# Altium PCB PCB_Pixhawk_Linux_Carrier_2021-08-31.pcbdoc (part 2 of 2)
Units mm, origin at the board's own origin, x right, y up, seen from the top; angles counter-clockwise.
Board outline 111.76 x 82.8 mm, 2 copper layers (Top Layer, Bottom Layer); 53 components, 220 nets, 468 pads, 151 vias.
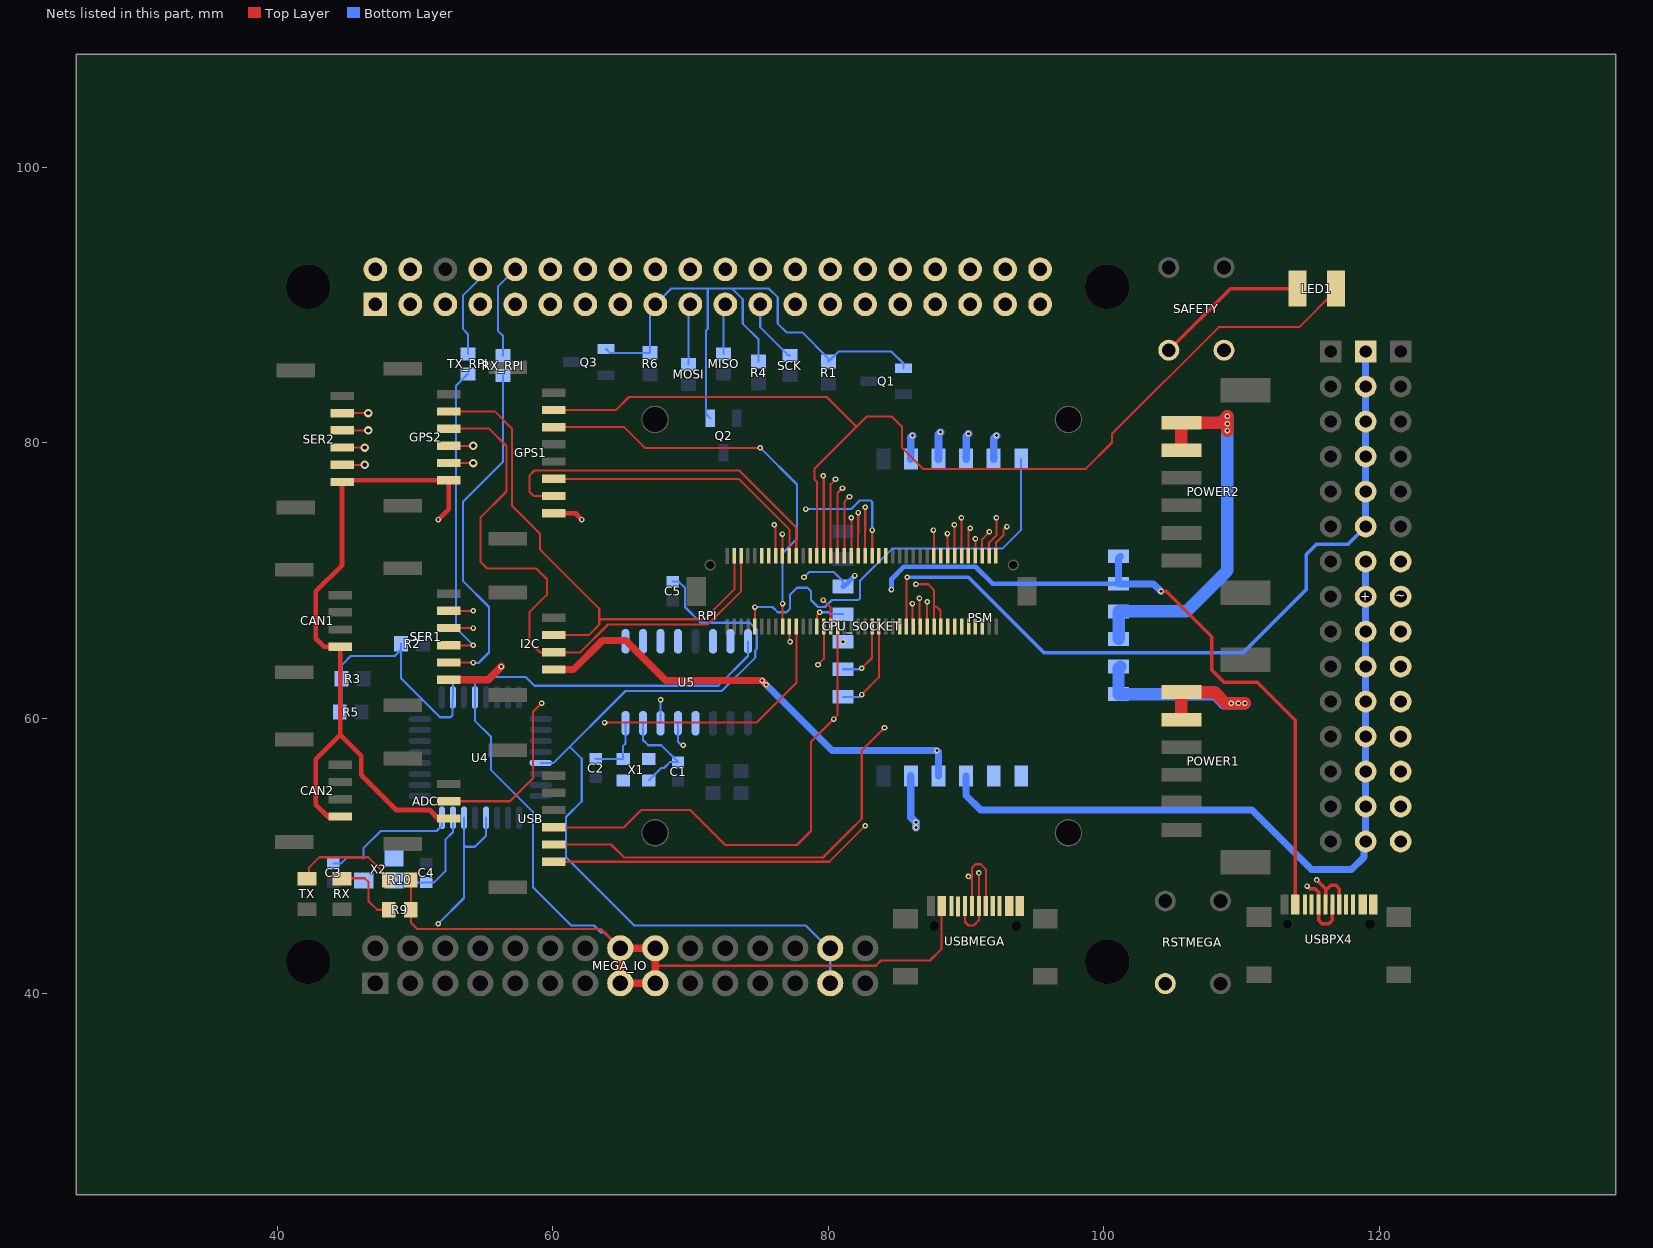
[diagram p2: the nets of this part, all layers, seen from the top]

## Via types
v1: diameter 0.4, hole 0.2, Top Layer to Bottom Layer, 145 vias
v2: diameter 0.61, hole 0.305, Top Layer to Bottom Layer, 6 vias

## Nets (pads, with @x,y where several pads share a name; then routed paths per layer and width w, separated by ;. In a path a pad name is that pad's centre, name@x,y a point inside that pad or via, vN(x,y) a via of type N, cw(c..) or ccw(c..) an arc to the next point about the centre after c; other vN are vias at no path point) (continued)
I2C_2_SCL: CPU_SOCKET.6 GPS2.4 I2C.2 | length 44.4
  Top Layer w0.15: GPS2.4@52.451,81.021 55.377,81.021 56.642,79.756 56.642,76.454 54.737,74.549 54.737,71.374 55.245,70.866 58.801,70.866 59.563,70.104 59.563,68.961 58.293,67.691 58.293,65.532 59.07,64.785 I2C.2@60.071,64.785 61.991,64.785 64.008,66.802 71.247,66.802 73.668,69.223 CPU_SOCKET.6@73.668,71.793
I2C_2_SDA: CPU_SOCKET.4 GPS2.5 I2C.3 | length 38.7
  Top Layer w0.15: GPS2.5@52.451,82.271 55.778,82.271 57.023,81.026 57.023,75.438 59.055,73.406 59.055,72.263 63.373,67.945 63.373,66.802 62.606,66.035 I2C.3@60.071,66.035 ; 63.373,67.183 70.993,67.183 73.172,69.362 CPU_SOCKET.4@73.172,71.79
IO-!RESET: CPU_SOCKET.75
IO-CH1-PROT: CPU_SOCKET.80 ~.7 | length 32.8
  Top Layer w0.15: CPU_SOCKET.80@92.165,71.793 92.165,72.734 92.71,73.279 92.71,73.66 v1(92.964,73.914)
  Mid-Layer 1 w0.254: v1(92.964,73.914) 92.71,73.66 92.71,73.152 93.218,72.644 120.015,72.644 121.412,71.374 ~.7@121.539,71.374
IO-CH2-PROT: CPU_SOCKET.78 ~.8 | length 37.7
  Top Layer w0.15: CPU_SOCKET.78@91.667,71.793 91.667,72.744 92.202,73.279 v1(92.202,74.549)
  Mid-Layer 1 w0.254: v1(92.202,74.549) 92.202,73.279 91.694,72.771 91.694,70.612 92.202,70.104 120.015,70.104 121.285,68.834 ~.8@121.539,68.834
IO-CH3-PROT: CPU_SOCKET.76 ~.9 | length 37.8
  Top Layer w0.15: CPU_SOCKET.76@91.164,71.793 91.164,73.003 v1(91.694,73.533)
  Mid-Layer 1 w0.254: v1(91.694,73.533) 91.186,73.025 91.186,69.723 93.345,67.564 120.269,67.564 ~.9@121.539,66.294
IO-CH4-PROT: CPU_SOCKET.74 ~.10 | length 37.9
  Top Layer w0.15: CPU_SOCKET.74@90.668,71.793 v1(90.678,73.025)
  Mid-Layer 1 w0.254: v1(90.678,73.025) 90.678,69.596 95.25,65.024 120.142,65.024 121.412,63.754 ~.10@121.539,63.754
IO-CH5-PROT: CPU_SOCKET.72 ~.11 | length 41.4
  Top Layer w0.15: CPU_SOCKET.72@90.166,71.793 90.166,73.656 v1(90.297,73.787)
  Mid-Layer 1 w0.254: v1(90.297,73.787) 90.071,73.561 90.071,69.441 97.028,62.484 120.015,62.484 121.285,61.214 ~.11@121.539,61.214
IO-CH6-PROT: CPU_SOCKET.70 ~.12 | length 44.4
  Top Layer w0.15: v1(89.662,74.549) CPU_SOCKET.70@89.665,71.791
  Mid-Layer 1 w0.254: v1(89.662,74.549) 89.662,69.088 92.456,66.294 92.583,66.294 98.933,59.944 120.142,59.944 121.412,58.674 ~.12@121.539,58.674
IO-CH7-PROT: CPU_SOCKET.68 ~.13 | length 45
  Top Layer w0.15: v1(89.154,74.041) CPU_SOCKET.68@89.165,71.792
  Mid-Layer 1 w0.254: v1(89.154,74.041) 89.154,68.961 100.711,57.404 120.142,57.404 121.412,56.134 ~.13@121.539,56.134
IO-CH8-PROT: CPU_SOCKET.66 ~.14 | length 45.4
  Top Layer w0.15: v1(88.646,73.406) CPU_SOCKET.66@88.667,71.793
  Mid-Layer 1 w0.254: v1(88.646,73.406) 88.646,68.834 102.616,54.864 120.015,54.864 121.285,53.594 ~.14@121.539,53.594
IO-LED_SAFET_PROT: CPU_SOCKET.28 GPS1.7 LED1.2 | length 77.5
  Top Layer w0.15: GPS1.7@60.071,82.378 64.598,82.378 65.532,83.312 79.883,83.312 82.042,81.153 82.804,81.915 84.582,81.915 85.344,81.153 85.344,79.629 86.868,78.105 98.679,78.105 100.584,80.01 100.584,80.645 108.331,88.392 114.173,88.392 116.843,91.062 LED1.2@116.843,91.186 ; CPU_SOCKET.28@79.165,71.79 79.165,77.172 78.994,77.343 78.994,78.105 82.1,81.211
IO-SWCLK: CPU_SOCKET.71
IO-SWDIO: CPU_SOCKET.69
IO-USART1_RX_SPEKTRUM_DSM: CPU_SOCKET.48
IO-USART1_TX: CPU_SOCKET.46
JP1_26: CPU_SOCKET.26
JP1_65: CPU_SOCKET.65
OTG_DM1: CPU_SOCKET.33 USB.3 USBPX4.A7 USBPX4.B7 | length 81.1
  Top Layer w0.15: USB.3@60.071,52.085 65.166,52.085 66.421,53.34 69.977,53.34 72.517,50.8 77.724,50.8 78.74,51.816 78.74,58.293 v1(80.391,59.944) 80.671,60.224 CPU_SOCKET.33@80.671,66.649
  Top Layer w0.254: v1(114.743,47.817) 114.935,47.625 115.316,47.625 115.582,47.359 USBPX4.B7@115.582,46.489 ; USBPX4.B7@115.582,46.489 115.583,45.326 115.824,45.085 116.332,45.085 116.581,45.344 USBPX4.A7@116.582,46.489
  Mid-Layer 2 w0.25: v1(80.391,59.944) 84.582,55.753 105.156,55.753 113.092,47.817 v1(114.743,47.817)
OTG_DM2: U5.6 USBMEGA.A7 USBMEGA.B7 | length 37.2
  Top Layer w0.15: USBMEGA.B7@89.928,46.362 89.916,45.212 90.17,44.958 90.551,44.958 90.927,45.334 USBMEGA.A7@90.928,46.362 v1(90.932,48.768)
  Mid-Layer 2 w0.15: v1(67.818,61.341) 67.818,59.182 68.453,58.547 69.596,58.547 77.089,51.054 88.773,51.054 90.932,48.895 v1(90.932,48.768)
  Bottom Layer w0.15: U5.6@67.818,59.639 v1(67.818,61.341)
OTG_DP1: CPU_SOCKET.31 USB.2 USBPX4.A6 USBPX4.B6 | length 88.3
  Top Layer w0.15: USB.2@60.071,50.835 64.227,50.835 65.173,49.889 79.607,49.889 81.534,51.816 82.423,52.705 82.423,57.658 v1(84.074,59.309) ; v1(79.629,68.58) 80.166,68.043 CPU_SOCKET.31@80.166,66.648
  Top Layer w0.254: v1(115.443,48.26) 116.083,47.62 116.083,47.503 ; USBPX4.A6@116.082,46.489 116.083,47.503 ; USBPX4.B6@117.082,46.489 117.081,47.612 116.84,47.879 116.459,47.879 116.083,47.503
  Mid-Layer 2 w0.25: v1(79.629,68.58) 80.137,68.072 80.137,61.087 82.169,59.055 82.169,58.928 ; v1(84.074,59.309) 83.693,58.928 82.169,58.928 ; v1(115.443,48.26) 115.189,48.514 112.966,48.514 112.966,48.578 105.156,56.388 84.709,56.388 82.169,58.928
OTG_DP2: U5.5 USBMEGA.A6 USBMEGA.B6 | length 33.8
  Top Layer w0.15: v1(90.17,48.514) 90.428,48.256 USBMEGA.A6@90.428,46.362 ; 90.429,48.255 90.429,49.144 90.678,49.403 91.059,49.403 91.427,49.035 USBMEGA.B6@91.428,46.362
  Mid-Layer 2 w0.15: v1(69.469,58.039) 76.835,50.673 88.392,50.673 90.17,48.895 v1(90.17,48.514)
  Bottom Layer w0.15: U5.5@69.088,59.639 69.088,58.293 69.342,58.039 v1(69.469,58.039)
PPM-SBUS-PROT: CPU_SOCKET.62 ~.15 | length 47.8
  Top Layer w0.15: v1(87.63,73.66) 87.667,73.623 CPU_SOCKET.62@87.667,71.793
  Mid-Layer 1 w0.254: v1(87.63,73.66) 87.63,69.215 104.521,52.324 119.761,52.324 121.031,51.054 ~.15@121.539,51.054
PRESSURE_SENS_IN: ADC.2 CPU_SOCKET.21 | length 37.3
  Top Layer w0.15: ADC.2@52.451,53.975 56.896,53.975 58.547,55.626 58.547,60.452 v1(59.182,61.087) ; v1(63.754,59.69) 74.803,59.69 77.672,62.559 CPU_SOCKET.21@77.672,66.649
  Mid-Layer 1 w0.15: v1(59.182,61.087) 59.182,60.325 59.817,59.69 v1(63.754,59.69)
PSM_2: PSM.2
R9_2: R9.2 RX.2 | length 5.2
  Top Layer w0.15: RX.2@44.704,48.344 44.747,48.387 46.355,48.387 46.609,48.133 46.609,46.736 47.244,46.101 R9.2@48.095,46.101
R10_2: R10.2 TX.2 | length 7.8
  Top Layer w0.15: TX.2@42.164,48.344 42.291,48.471 42.291,49.149 43.053,49.911 46.609,49.911 48.095,48.425 R10.2@48.095,48.26
RESET: C5.1 MEGA_IO.27 MEGA_IO.28 RSTMEGA.2 U4.29 | length 92.6
  Mid-Layer 2 w0.15: MEGA_IO.28@80.137,43.307 80.137,43.688 81.153,44.704 85.471,44.704 87.122,46.355 102.108,46.355 104.521,43.942 104.521,40.8 RSTMEGA.2@104.457,40.737
  Bottom Layer w0.15: U4.29@59.118,56.756 60.058,56.756 65.278,61.976 72.263,61.976 74.691,64.404 74.691,64.912 74.803,65.024 74.803,66.421 74.295,66.929 70.739,66.929 69.596,68.072 69.596,69.469 69.149,69.916 C5.1@68.707,69.915 ; 61.239,57.937 62.103,57.072 62.103,53.975 60.96,52.832 60.96,49.911 65.913,44.958 78.359,44.958 80.01,43.307 MEGA_IO.28@80.137,43.307 MEGA_IO.27@80.137,40.767
RPI_RX: RPI.10 RX_RPI.2 | length 6.9
  Bottom Layer w0.15: RX_RPI.2@56.388,86.323 56.388,87.757 56.007,88.138 56.007,91.313 RPI.10@57.277,92.583
RPI_TX: RPI.8 TX_RPI.2 | length 6.8
  Bottom Layer w0.15: TX_RPI.2@53.848,86.45 53.848,87.884 53.467,88.265 53.467,90.678 54.737,91.948 RPI.8@54.737,92.583
RX_5V0_OUT: +.7 +.8 +.9 +.10 +.11 +.12 +.13 +.14 +.15 PSM.3 | length 54.4
  Bottom Layer w0.508: PSM.3@89.993,55.801 89.993,54.406 91.059,53.34 110.744,53.34 115.062,49.022 117.983,49.022 118.872,49.911 118.872,50.927 +.15@118.999,51.054 +.7@118.999,71.374
S$68: 
S$387: 
S$389: 
S$392: 
S$394: 
S$8524: 
S$8528: 
S$8534: 
S$8536: 
S$8538: 
S$8542: 
S$8544: 
S$8546: 
S$8550: 
S$8552: 
S$8554: 
S$8562: 
S$8564: 
S$8566: 
S$8708: 
S$8710: 
S$8712: 
S$8759: 
S$8763: 
S$8765: 
S$8769: 
S$8771: 
S$8773: 
S$8776: 
S$8778: 
S$8787: 
S$8789: 
S$8793: 
S$8795: 
S.BUS_OUT: CPU_SOCKET.64
SAFETY: CPU_SOCKET.17 GPS1.6 SAFETY.4 | length 71.5
  Top Layer w0.15: GPS1.6@60.071,81.128 65.176,81.128 66.675,79.629 v1(75.057,79.629) ; CPU_SOCKET.17@76.672,66.649 v1(76.672,68.326)
  Mid-Layer 2 w0.15: v1(75.057,79.629) 75.057,85.598 77.724,88.265 107.157,88.265 SAFETY.4@108.712,86.711
  Bottom Layer w0.15: v1(75.057,79.629) 77.724,76.962 77.724,73.025 76.672,71.973 v1(76.672,68.326)
SERIAL1_CTS: CPU_SOCKET.44 SER1.4 | length 38.8
  Top Layer w0.15: SER1.4@52.451,66.543 v1(54.229,66.543) ; CPU_SOCKET.44@83.167,71.793 ccw(c83.167,71.81) 83.185,71.81 83.185,73.533 v1(83.185,73.66)
  Mid-Layer 1 w0.15: v1(54.229,66.543) 54.478,66.543 55.423,67.488 61.011,67.488 68.961,75.438 78.232,75.438 78.359,75.311 v1(78.359,75.184)
  Bottom Layer w0.15: v1(78.359,75.184) 81.661,75.184 82.296,75.819 83.058,75.819 83.185,75.692 v1(83.185,73.66)
SERIAL1_RTS: CPU_SOCKET.42 SER1.5 | length 37.2
  Top Layer w0.15: SER1.5@52.451,67.793 v1(54.229,67.793) ; CPU_SOCKET.42@82.665,71.793 v1(82.677,75.311)
  Mid-Layer 1 w0.15: v1(54.229,67.793) 60.808,67.793 68.783,75.768 81.204,75.768 81.407,75.565 82.265,75.565 82.423,75.565 v1(82.677,75.311)
SERIAL1_RX: CPU_SOCKET.40 SER1.3 TX_RPI.1 | length 58.8
  Top Layer w0.15: SER1.3@52.451,65.293 v1(54.229,65.293) ; CPU_SOCKET.40@82.166,71.793 v1(82.169,74.93)
  Mid-Layer 1 w0.15: v1(54.229,65.293) 55.372,66.421 55.372,66.929 55.626,67.183 61.214,67.183 61.468,67.437 61.595,67.437 69.088,74.93 77.343,74.93 78.105,74.168 78.486,74.168 79.756,75.438 81.026,75.438 81.28,75.184 81.915,75.184 v1(82.169,74.93)
  Bottom Layer w0.15: TX_RPI.1@53.848,85 52.959,84.111 52.959,66.563 v1(54.229,65.293)
SERIAL1_TX: CPU_SOCKET.38 RX_RPI.1 SER1.2 | length 61.1
  Top Layer w0.15: SER1.2@52.451,64.043 v1(54.229,64.043) ; CPU_SOCKET.38@81.665,71.792 v1(81.665,74.549)
  Mid-Layer 1 w0.15: v1(54.229,64.043) 54.772,64.043 55.372,64.643 55.372,65.532 56.719,66.879 61.595,66.879 61.595,66.929 69.215,74.549 77.216,74.549 77.978,73.787 78.994,73.787 79.756,74.549 81.231,74.549 v1(81.665,74.549)
  Bottom Layer w0.15: v1(54.229,64.043) 54.264,64.008 54.61,64.008 55.372,64.77 55.372,68.072 53.467,69.977 53.467,75.692 56.388,78.613 RX_RPI.1@56.388,84.873
SERIAL2_CTS: CPU_SOCKET.32 SER2.4 | length 43.5
  Top Layer w0.15: SER2.4@44.704,80.894 v2(46.609,80.894) ; CPU_SOCKET.32@80.167,71.793 80.168,76.993 v1(80.518,77.343)
  Mid-Layer 1 w0.15: v2(46.609,80.894) 47.503,80.894 51.689,76.708 79.883,76.708 v1(80.518,77.343)
SERIAL2_RTS: CPU_SOCKET.30 SER2.5 | length 42.9
  Top Layer w0.15: SER2.5@44.704,82.144 v2(46.609,82.144) ; v1(79.629,77.597) 79.666,77.56 CPU_SOCKET.30@79.666,71.792
  Mid-Layer 1 w0.15: v2(46.609,82.144) 46.888,82.144 51.816,77.216 79.248,77.216 v1(79.629,77.597)
SERIAL2_RX: CPU_SOCKET.34 SER2.3 | length 42.9
  Top Layer w0.15: SER2.3@44.704,79.644 v2(46.355,79.644) ; CPU_SOCKET.34@80.662,71.792 80.662,76.344 v1(81.026,76.708)
  Mid-Layer 1 w0.15: v2(46.355,79.644) 48.245,79.644 51.512,76.377 80.137,76.377 80.468,76.708 v1(81.026,76.708)
SERIAL2_TX: CPU_SOCKET.36 SER2.2 | length 42.2
  Top Layer w0.15: SER2.2@44.704,78.394 v2(46.355,78.394) ; CPU_SOCKET.36@81.166,71.793 81.167,75.705 v1(81.534,76.073)
  Mid-Layer 1 w0.15: v2(46.355,78.394) 48.987,78.394 51.308,76.073 v1(81.534,76.073)
SERIAL3_RX: CPU_SOCKET.20 GPS1.3 | length 20.5
  Top Layer w0.15: GPS1.3@60.071,77.378 73.498,77.378 77.168,73.708 CPU_SOCKET.20@77.167,71.794
SERIAL3_TX: CPU_SOCKET.22 GPS1.2 | length 26.4
  Top Layer w0.15: GPS1.2@60.071,76.128 58.619,76.128 58.293,76.454 58.293,77.597 58.674,77.978 73.533,77.978 77.668,73.843 CPU_SOCKET.22@77.668,71.793
SERIAL4_RX: CPU_SOCKET.16 GPS2.3 | length 28.3
  Top Layer w0.15: GPS2.3@52.451,79.771 v2(54.229,79.771) ; v1(76.073,74.041) 76.168,73.946 CPU_SOCKET.16@76.167,71.793
  Mid-Layer 2 w0.15: v2(54.229,79.771) 70.343,79.771 v1(76.073,74.041)
SERIAL4_TX: CPU_SOCKET.18 GPS2.2 | length 28
  Top Layer w0.15: GPS2.2@52.451,78.521 v2(54.229,78.521) ; CPU_SOCKET.18@76.668,71.793 v1(76.668,73.366) v1@76.708,73.406
  Mid-Layer 2 w0.15: v2(54.229,78.521) 70.83,78.522 75.946,73.406 v1@76.708,73.406
SERIAL5_RX: CPU_SOCKET.12
SERIAL5_TX: CPU_SOCKET.14
SPI_EXT_MISO: CPU_SOCKET.67
SPI_EXT_MOSI: CPU_SOCKET.51
SPI_EXT_SCK: CPU_SOCKET.73
U3_1: RPI.1
U3_2: RPI.2
U3_3: RPI.3
U3_4: RPI.4
U3_5: RPI.5
U3_7: RPI.7
U3_9: RPI.9
U3_11: RPI.11
U3_12: RPI.12
U3_13: RPI.13
U3_14: RPI.14
U3_15: RPI.15
U3_16: RPI.16
U3_18: RPI.18
U3_19: MOSI.2 RPI.19 | length 4.4
  Bottom Layer w0.15: MOSI.2@69.85,85.688 69.85,89.915 RPI.19@69.977,90.043
U3_20: RPI.20
U3_21: MISO.2 RPI.21 | length 3.6
  Bottom Layer w0.15: MISO.2@72.39,86.45 72.39,89.915 RPI.21@72.517,90.043
U3_22: RPI.22
U3_23: RPI.23 SCK.2 | length 4.7
  Bottom Layer w0.15: RPI.23@75.057,90.043 75.057,88.392 77.126,86.323 SCK.2@77.216,86.323
U3_24: RPI.24
U3_25: RPI.25
U3_26: RPI.26
U3_27: RPI.27
U3_28: RPI.28
U3_29: RPI.29
U3_30: RPI.30
U3_31: RPI.31
U3_32: RPI.32
U3_33: RPI.33
U3_34: RPI.34
U3_35: RPI.35
U3_36: RPI.36
U3_37: RPI.37
U3_38: RPI.38
U3_39: RPI.39
U3_40: RPI.40
U5_4: U5.4
U5_9: U5.9
U5_10: U5.10
U5_11: U5.11
U5_12: U5.12
U5_14: U5.14
U5_15: U5.15
USB1_A5: USBMEGA.A5
USB1_A8: USBMEGA.A8
USB1_B1A12: USBMEGA.B1A12
USB1_B4A9: USBMEGA.B4A9
USB1_B5: USBMEGA.B5
USB1_B8: USBMEGA.B8
USB3_A5: USBPX4.A5
USB3_A8: USBPX4.A8
USB3_B1A12: USBPX4.B1A12
USB3_B4A9: USBPX4.B4A9
USB3_B5: USBPX4.B5
USB3_B8: USBPX4.B8
VBUS: CPU_SOCKET.29 PSM.11 PSM.20 PSM.21 USB.1 USBPX4.A4B9 | length 107
  Top Layer w0.15: USB.1@60.071,49.585 80.065,49.585 v1(82.677,52.197) ; v1(79.248,63.881) 79.672,64.305 CPU_SOCKET.29@79.672,66.649
  Top Layer w0.254: v1(104.14,69.215) 104.521,69.215 107.823,65.913 107.823,63.5 108.712,62.611 111.125,62.611 113.882,59.854 USBPX4.A4B9@113.882,46.489
  Mid-Layer 1 w0.15: v1(79.248,63.881) 79.248,62.23 82.804,58.674 82.804,52.324 v1(82.677,52.197)
  Mid-Layer 1 w0.35: v1(81.915,70.358) 83.566,70.358 v1(84.582,69.342)
  Mid-Layer 2 w0.15: v1(78.232,70.231) 77.597,69.596 77.597,68.199 78.74,67.056 78.867,67.056 79.248,66.675 v1(79.248,63.881)
  Bottom Layer w0.15: v1(78.232,70.231) 78.613,70.612 80.391,70.612 81.063,69.94 PSM.11@81.063,69.556
  Bottom Layer w0.35: PSM.11@81.063,69.556 81.113,69.556 v1(81.915,70.358) ; v1(84.582,69.342) 84.582,70.104 85.471,70.993 90.678,70.993 91.915,69.756 PSM.21@101.063,69.756
  Bottom Layer w0.508: PSM.20@101.19,71.756 101.063,71.629 PSM.21@101.063,69.756 103.599,69.756 v1(104.14,69.215)
VBUS_VALID: CPU_SOCKET.59 PSM.18 | length 23.1
  Top Layer w0.15: CPU_SOCKET.59@87.17,66.649 v1(87.171,68.453)
  Mid-Layer 2 w0.15: v1(87.171,68.453) 92.329,68.453 94.996,71.12 94.996,74.803 92.202,77.597 v1(92.202,80.518)
  Bottom Layer w0.55: PSM.18@91.993,78.803 91.993,80.309 v1(92.202,80.518)
VDD_3V3_SPEKTRUM: PSM.1
VDD_3V3_SPEKTRUM_EN: CPU_SOCKET.19 PSM.9 | length 5
  Top Layer w0.15: CPU_SOCKET.19@77.172,66.65 77.172,65.6 v1(77.216,65.556)
  Mid-Layer 1 w0.15: v1(77.216,65.556) v1(81.063,65.556)
VDD_5V_ARDU: MEGA_IO.15 MEGA_IO.16 MEGA_IO.17 MEGA_IO.18 R2.2 R3.2 R5.2 R9.1 R10.1 U4.4 U4.6 U4.18 U4.20 U5.16 USBMEGA.A4B9 | length 158.8
  Top Layer w0.15: R10.1@49.695,48.26 R9.1@49.695,46.101 49.695,45.174 50.165,44.704 63.5,44.704 MEGA_IO.16@64.897,43.307 ; 67.437,42.044 ccw(c67.444,42.044) 67.444,42.037 ; USBMEGA.A4B9@88.228,46.362 88.227,43.269 87.376,42.418 83.82,42.418 83.439,42.037 67.31,42.037 67.31,43.18 MEGA_IO.18@67.437,43.307 ; MEGA_IO.16@64.897,43.307 MEGA_IO.18@67.437,43.307 ; MEGA_IO.16@64.897,43.307 MEGA_IO.15@64.897,40.767 MEGA_IO.17@67.437,40.767 MEGA_IO.18@67.437,43.307
  Top Layer w0.55: MEGA_IO.15@64.897,40.767 MEGA_IO.17@67.437,40.767 MEGA_IO.18@67.437,43.307 MEGA_IO.16@64.897,43.307 MEGA_IO.15@64.897,40.767
  Mid-Layer 1 w0.15: v1(51.689,45.085) 62.865,45.085 63.5,44.45 63.754,44.45 MEGA_IO.16@64.897,43.307
  Bottom Layer w0.15: R5.2@44.539,60.452 44.666,60.579 R3.2@44.666,62.865 44.704,62.903 44.704,63.881 45.339,64.516 48.514,64.516 48.984,64.986 R2.2@48.984,65.405 48.984,62.903 51.816,60.071 52.578,60.071 52.705,60.198 52.705,61.478 U4.18@52.746,61.519 52.746,62.443 52.705,62.484 53.213,62.992 54.102,62.992 54.346,62.748 U4.20@54.346,61.519 54.346,59.827 55.499,58.674 55.499,56.261 58.547,53.213 58.547,47.752 61.341,44.958 62.992,44.958 63.5,44.45 63.754,44.45 MEGA_IO.16@64.897,43.307 ; v1(51.689,45.085) 53.556,46.952 U4.6@53.556,52.781 ; 53.556,50.799 53.682,50.673 54.356,50.673 55.154,51.471 U4.4@55.154,52.781 ; 53.848,62.992 58.039,62.992 58.674,62.357 72.009,62.357 74.168,64.516 U5.16@74.168,65.583
VDD_5V_BACKUP: POWER2.1 POWER2.2 PSM.22 PSM.23 | length 28.9
  Top Layer w0.908: POWER2.2@105.625,79.454 POWER2.1@105.625,81.454 108.505,81.454 v1(108.966,81.915) v1(108.966,80.883)
  Bottom Layer w0.908: PSM.22@101.061,67.756 105.983,67.756 108.966,70.739 v1(108.966,80.883) v1(108.966,81.378) v1(108.966,81.915) ; PSM.23@101.063,65.756 101.063,67.632 PSM.22@101.188,67.756
VDD_5V_BRICK: POWER1.1 POWER1.2 PSM.24 PSM.25 | length 18.5
  Top Layer w0.902: POWER1.2@105.625,59.896 POWER1.1@105.625,61.896 108.03,61.896 108.839,61.087 v1(110.236,61.087)
  Bottom Layer w0.902: PSM.24@101.19,63.756 101.061,63.626 PSM.25@101.061,61.756 108.043,61.756 108.712,61.087 v1(109.245,61.087) v1(109.765,61.087) v1(110.236,61.087)
VDD_5V_HIPOWER: PSM.5 SER1.1 | length 53
  Top Layer w0.15: SER1.1@52.451,62.793 55.3,62.793 v1(56.261,63.754)
  Top Layer w0.55: SER1.1@52.451,62.793 55.3,62.793 v1(56.261,63.754)
  Mid-Layer 1 w0.55: v1(56.261,63.754) 58.166,63.754 59.309,62.611 73.025,62.611 78.359,57.277 80.391,57.277 81.661,56.007 81.661,51.054 82.677,50.038 85.471,50.038 86.36,50.927 v1@86.36,52.578
  Bottom Layer w0.55: PSM.5@85.993,55.806 85.994,52.817 v1(86.36,52.451) v1(86.36,52.07)
VDD_5V_HIPOWER_OC: CPU_SOCKET.45 PSM.7 | length 6.9
  Top Layer w0.15: v1(82.423,61.722) 83.671,62.97 CPU_SOCKET.45@83.671,66.649
  Bottom Layer w0.15: PSM.7@81.063,61.556 82.257,61.556 v1(82.423,61.722)
VDD_5V_IN_PROT: CPU_SOCKET.61 CPU_SOCKET.63 PSM.15 | length 21.3
  Top Layer w0.15: v1(86.36,69.723) 87.249,69.723 87.671,69.301 CPU_SOCKET.61@87.671,66.649 ; 87.671,68.115 87.841,68.115 88.138,67.818 88.138,66.681 CPU_SOCKET.63@88.171,66.649
  Mid-Layer 2 w0.15: v1(86.106,80.518) 86.106,77.089 85.725,76.708 84.709,76.708 83.566,75.565 83.566,74.803 86.36,72.009 v1(86.36,69.723)
  Bottom Layer w0.55: PSM.15@85.993,78.806 85.993,80.405 v1(86.106,80.518)
VDD_5V_PERIPH: ADC.1 CAN1.1 CAN2.1 GPS1.1 GPS2.1 I2C.1 LED1.1 PSM.4 SAFETY.2 SER2.1 | length 186.8
  Top Layer w0.254: SAFETY.2@104.712,86.711 109.187,91.186 LED1.1@114.043,91.186
  Top Layer w0.35: CAN2.1@44.577,52.867 43.653,52.867 42.799,53.721 42.799,57.023 44.577,58.801 ; v1(51.689,74.422) 52.451,75.184 GPS2.1@52.451,77.271 44.831,77.271 SER2.1@44.704,77.144 44.704,71.12 42.799,69.215 42.799,65.786 43.399,65.186 CAN1.1@44.577,65.186 44.577,58.801 ; ADC.1@52.451,52.725 51.669,52.725 51.054,53.34 48.641,53.34 46.101,55.88 46.101,57.278 44.577,58.801 ; GPS1.1@60.071,74.878 61.647,74.878 v1(62.103,74.422)
  Top Layer w0.505: I2C.1@60.071,63.535 61.503,63.535 63.627,65.659 65.278,65.659 68.199,62.738 v1(75.184,62.738) v1@75.487,62.435
  Mid-Layer 2 w0.25: v1(87.884,57.658) 87.884,58.547 91.821,62.484 112.268,62.484 113.284,63.5 113.284,63.754 113.284,82.55 111.506,84.328 107.061,84.328 104.712,86.677 SAFETY.2@104.712,86.711
  Mid-Layer 2 w0.35: v1(51.689,74.422) v1(62.103,74.422) 63.373,74.422 68.072,69.723 68.199,69.723 v1@75.487,62.435
  Bottom Layer w0.15: v1(87.884,57.658) 87.993,57.549 PSM.4@87.993,55.806
  Bottom Layer w0.505: v1(75.184,62.738) 75.487,62.435 80.264,57.658 v1(87.884,57.658) 87.993,57.549 PSM.4@87.993,55.806
  other v1: 75.488,62.434
VDD_5V_PERIPH_EN: CPU_SOCKET.27 PSM.10 | length 2.9
  Top Layer w0.15: CPU_SOCKET.27@79.17,66.648 79.17,67.487 v1(79.375,67.691)
  Bottom Layer w0.15: v1(79.375,67.691) 80.01,67.691 80.145,67.556 PSM.10@81.066,67.556
VDD_5V_PERIPH_OC: CPU_SOCKET.43 PSM.8 | length 4.7
  Top Layer w0.15: v1(82.423,63.627) 83.17,64.374 CPU_SOCKET.43@83.17,66.649
  Bottom Layer w0.15: PSM.8@81.063,63.556 82.352,63.556 v1(82.423,63.627)
VDD_BACKUP_VALID: CPU_SOCKET.57 PSM.17 | length 26.1
  Top Layer w0.15: v1(86.614,68.707) 86.614,66.704 CPU_SOCKET.57@86.668,66.65
  Mid-Layer 2 w0.15: v1(86.614,68.707) 86.741,68.707 89.535,71.501 91.313,71.501 92.583,70.231 93.599,70.231 94.488,71.12 94.488,74.295 92.075,76.708 90.551,76.708 90.17,77.089 v1(90.17,80.645)
  Bottom Layer w0.55: PSM.17@89.993,78.809 89.993,80.468 v1(90.17,80.645)
VDD_BRICK_VALID: CPU_SOCKET.55 PSM.16 | length 25.8
  Top Layer w0.15: v1(86.106,68.326) 86.106,66.714 CPU_SOCKET.55@86.172,66.649
  Mid-Layer 2 w0.15: v1(86.106,68.326) 86.106,68.834 86.487,69.215 86.741,69.215 89.662,72.136 93.218,72.136 94.107,73.025 94.107,74.168 92.456,75.819 89.662,75.819 88.138,77.343 v1(88.138,80.772)
  Bottom Layer w0.55: PSM.16@87.993,78.806 87.993,80.627 v1(88.138,80.772)
VDD_RPI_3V3: Q1.1 Q2.1 Q3.1 R1.2 R4.2 R6.2 RPI.17 | length 45.7
  Bottom Layer w0.15: Q3.1@63.861,86.802 64.137,86.525 R6.2@67.056,86.525 67.056,89.661 RPI.17@67.437,90.043 68.581,91.186 73.025,91.186 73.787,90.424 73.787,88.646 74.93,87.503 R4.2@74.93,85.89 ; 71.247,91.186 71.247,88.265 71.12,88.138 71.12,82.088 Q2.1@71.44,81.768 ; 72.942,91.186 75.692,91.186 76.327,90.551 76.327,88.646 76.962,88.011 78.105,88.011 80.01,86.106 R1.2@80.01,85.89 80.734,86.614 84.582,86.614 85.451,85.745 Q1.1@85.451,85.405
VDD_SERVO: +.1 +.2 +.3 +.4 +.5 +.6 CPU_SOCKET.53 | length 57.1
  Top Layer w0.15: CPU_SOCKET.53@85.669,66.649 85.669,70.175 v1(85.725,70.231)
  Bottom Layer w0.254: v1(85.725,70.231) 90.17,70.231 95.631,64.77 110.109,64.77 114.681,69.342 114.681,71.882 115.443,72.644 117.729,72.644 +.6@118.999,73.914
  Bottom Layer w0.508: +.6@118.999,73.914 v1(118.999,86.614)
VDD_SERVO_IN: CPU_SOCKET.9 PSM.19 | length 31.4
  Top Layer w0.15: CPU_SOCKET.9@74.671,66.649 v1(74.671,68.072)
  Bottom Layer w0.15: v1(74.671,68.072) 75.946,68.072 76.327,67.691 76.962,67.691 77.216,67.945 77.216,68.961 77.724,69.469 78.486,69.469 78.74,69.215 78.74,68.58 79.248,68.072 79.756,68.072 80.264,68.58 82.169,68.58 82.296,68.707 82.296,69.977 84.633,72.314 92.634,72.314 93.993,73.673 PSM.19@93.993,78.806
X0_MEGA: C4.2 U4.7 X2.3 | length 8.3
  Bottom Layer w0.15: X2.3@48.471,48.222 48.625,48.068 C4.2@50.8,48.068 51.37,48.068 52.197,48.895 52.197,51.181 52.756,51.74 U4.7@52.756,52.781
X1_2: X1.2
X1_4: X1.4
X1_CH: C1.2 U5.7 X1.1 | length 7.1
  Bottom Layer w0.15: U5.7@66.548,59.639 66.548,58.42 66.929,58.039 67.883,58.039 C1.2@69.088,56.834 68.518,56.834 68.072,56.388 67.877,56.388 X1.1@66.97,55.481
X1_MEGA: C3.2 U4.8 X2.1 | length 10.1
  Bottom Layer w0.15: C3.2@44.069,49.468 44.642,49.468 45.085,49.911 46.182,49.911 X2.1@46.271,49.822 46.271,50.589 47.498,51.816 51.562,51.816 51.956,52.21 U4.8@51.956,52.781
X2_2: X2.2
X2_4: X2.4
XO_CH: C2.2 U5.8 X1.3 | length 4.7
  Bottom Layer w0.15: C2.2@63.119,57.088 63.166,57.041 X1.3@65.11,57.041 65.11,57.998 65.278,58.166 U5.8@65.278,59.639
pads on no net: CPU_SOCKET.81 CPU_SOCKET.82 CPU_SOCKET.83 CPU_SOCKET.xx RPI. RSTMEGA.1 RSTMEGA.3 SAFETY.1 SAFETY.3 USBMEGA. USBPX4.

## Polygon pours and split planes (outlines as drawn)
GND on Top Layer (solid): 38.735,91.44 cw(c42.164,91.44) 42.164,94.869 121.031,94.869 cw(c121.031,92.202) 123.698,92.202 123.698,91.948 123.698,41.402 cw(c121.158,41.402) 121.158,38.862 41.656,38.862 cw(c41.656,41.783) 38.735,41.783 38.735,42.037 38.735,91.44
GND on Bottom Layer (solid): 38.735,91.313 38.735,91.821 cw(c41.529,91.821) 41.529,94.615 120.904,94.615 cw(c120.904,94.488) 121.031,94.488 cw(c121.031,91.948) 123.571,91.948 123.571,41.275 cw(c121.031,41.275) 121.031,38.735 41.783,38.862 cw(c41.397,41.501) 38.735,41.656 38.735,91.567

## Keep-outs
Keep-Out Layer:
  lines w0.508 net S$8528: 120.777,38.354 ccw(c120.777,41.783) 124.206,41.783
  lines w0.508 net S$8542: 120.904,95.25 cw(c120.904,91.948) 124.206,91.948
  lines w0.508 net S$8550: 38.354,91.821 cw(c41.783,91.821) 41.783,95.25
  lines w0.508 net S$8566: 38.354,41.91 ccw(c41.91,41.91) 41.91,38.354

## Silkscreen, mask and mechanical layers (free items; w line width, h text height)
Top Overlay:
  circle w0.308: c67.437,81.661 r1.529
  circle w0.308: c67.437,51.689 r1.55
  circle w0.308: c97.409,81.661 r1.55
  circle w0.308: c97.409,51.689 r1.529
  region: 123.735,49.784 115.189,49.784 115.189,49.911 115.189,72.644 123.735,72.644
  region: 68.961,93.98 76.327,93.98 76.327,93.914 76.2,93.914 76.2,87.884 68.707,87.884 68.707,93.98
  region: 53.594,94.823 58.547,94.823 58.547,91.313 53.467,91.313 53.467,91.44 53.467,94.823
  region: 68.707,44.958 63.627,44.958 63.627,44.577 63.627,38.869 68.707,38.869
  region: 81.407,38.869 81.534,38.869 81.534,45.085 84.074,45.085 84.074,38.869 81.534,38.869 81.407,38.869
  text "KINGPHOENIX LINUX BOARD V1" at 76.581,86.741 h2
  text "SPI_PINS" at 69.723,86.614 h1.27
  text "1" at 114.554,86.233 h1.27 r270
  text "AUX" at 113.284,84.963 h1.27 r90
  text "2" at 114.462,83.804 h1.27 r270
  text "3" at 114.427,81.026 h1.27 r267
  text "4" at 114.554,78.486 h1.27 r237
  text "5" at 114.554,76.2 h1.27 r263
  text "6" at 114.427,73.533 h1.27 r272
  text "M1" at 114.427,70.485 h1.27 r90
  text "M2" at 114.427,68.199 h1.27 r90
  text "M3" at 114.427,65.532 h1.27 r90
  text "M4" at 114.427,62.992 h1.27 r90
  text "M5" at 114.554,60.579 h1.27 r89
  text "M6" at 114.427,58.039 h1.27 r90
  text "M7" at 114.427,55.372 h1.27 r90
  text "M8" at 114.427,52.832 h1.27 r90
  text "PPM" at 114.554,49.657 h1.27 r90
  text "5V_MEGA" at 64.008,45.466 h1.27
Bottom Overlay:
  circle w0.308: c67.437,81.661 r1.626
  circle w0.308: c97.409,81.661 r1.529
  circle w0.308: c97.409,51.689 r1.616
  circle w0.308: c67.437,51.689 r1.626
  region: 102.997,94.869 102.997,77.47 104.013,77.47 104.013,73.914 102.997,73.914 102.997,71.501 102.997,70.739 110.236,70.612 123.952,70.739 123.952,92.075 ccw(c121.031,92.075) 121.031,94.996 120.777,94.996 102.997,94.996
  region net S$8778: 102.997,70.739 102.997,38.354 121.412,38.354 ccw(c121.412,41.021) 124.079,41.021 124.079,41.529 123.952,70.739 114.046,70.739 114.173,66.929 114.046,62.865 113.919,62.992 107.696,62.738 107.696,63.627 107.696,63.881 107.95,66.04 107.823,70.739 103.251,70.866
  region: 113.919,66.802 114.3,66.802 114.3,67.691 114.427,67.691 114.427,67.564 114.681,67.564 114.681,66.802 114.3,66.802 114.3,66.421 114.046,66.421 114.046,66.167
  region: 114.046,66.675 114.427,66.675 114.427,67.31
  lines w0.128 net S$8773: 114.173,67.056 114.173,67.564
  lines w0.254 net S$8776: 82.55,38.862 120.523,38.862
  lines w0.254 net S$8778: 42.164,38.862 103.124,38.862
  lines w0.254 net S$8787: 38.735,41.91 ccw(c41.783,41.91) 41.783,38.862 42.164,38.862
  lines w0.254 net S$8789: 38.735,41.91 38.735,60.071 38.735,86.614 38.735,91.821
  lines w0.254 net S$8793: 38.735,91.821 cw(c41.783,91.821) 41.783,94.869 42.037,94.869
  lines w0.254 net S$8795: 42.037,94.869 104.521,94.869 104.521,94.615
  lines w0.308 net S$8708: 100.33,46.99 101.854,46.99
  lines w0.308 net S$8710: 101.473,47.498 101.854,47.117 101.854,46.99
  lines w0.308 net S$8712: 101.473,46.482 101.854,46.863 101.854,47.117
  lines w0.308 net S$8759: 114.3,66.167 114.427,66.167 114.427,66.929
  lines w0.308 net S$8763: 114.173,66.167 114.173,67.056
  lines w0.308 net S$8765: 109.347,70.739 109.347,70.612 114.427,70.612
  lines w0.308 net S$8769: 107.315,62.738 107.823,62.738
  lines w0.308 net S$8771: 114.173,63.246 114.173,67.056
  text "ISOLATE AREA" at 99.695,45.655 h1.4

## Text inside footprints (layer, text, board x,y; h text height)
CPU_SOCKET: Top Overlay "CPU" at 97.806,57.912 h2 r270